# Altium PCB 主控制器.PcbDoc
Units mil, origin at the board's own origin, x right, y up, seen from the top; angles counter-clockwise.
Board outline 2580.03 x 2217.03 mil, 4 copper layers (Top Layer, MidLayer1, MidLayer2, Bottom Layer); 92 components, 94 nets, 348 pads, 139 vias.
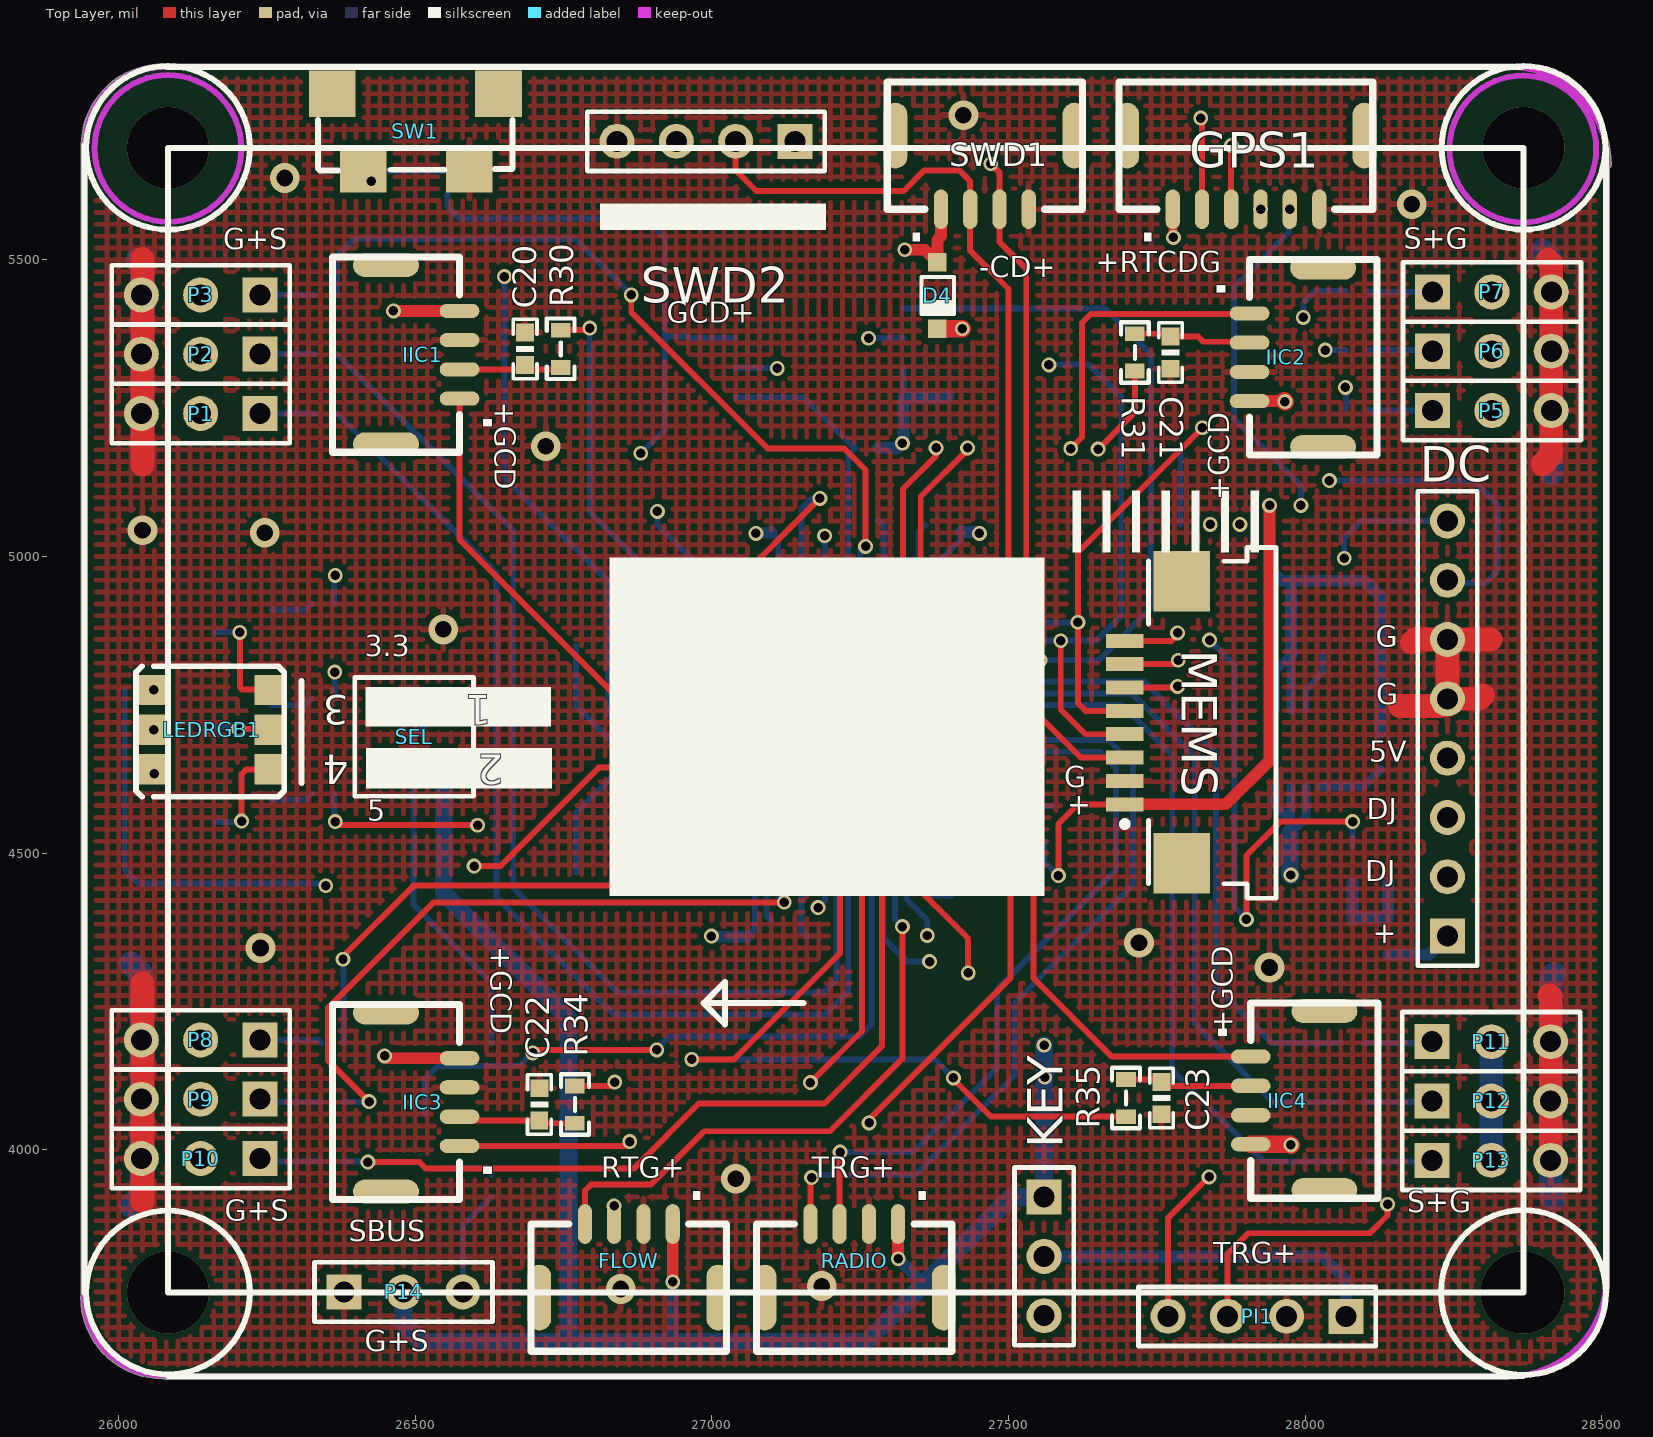
[diagram p0: Top Layer view]
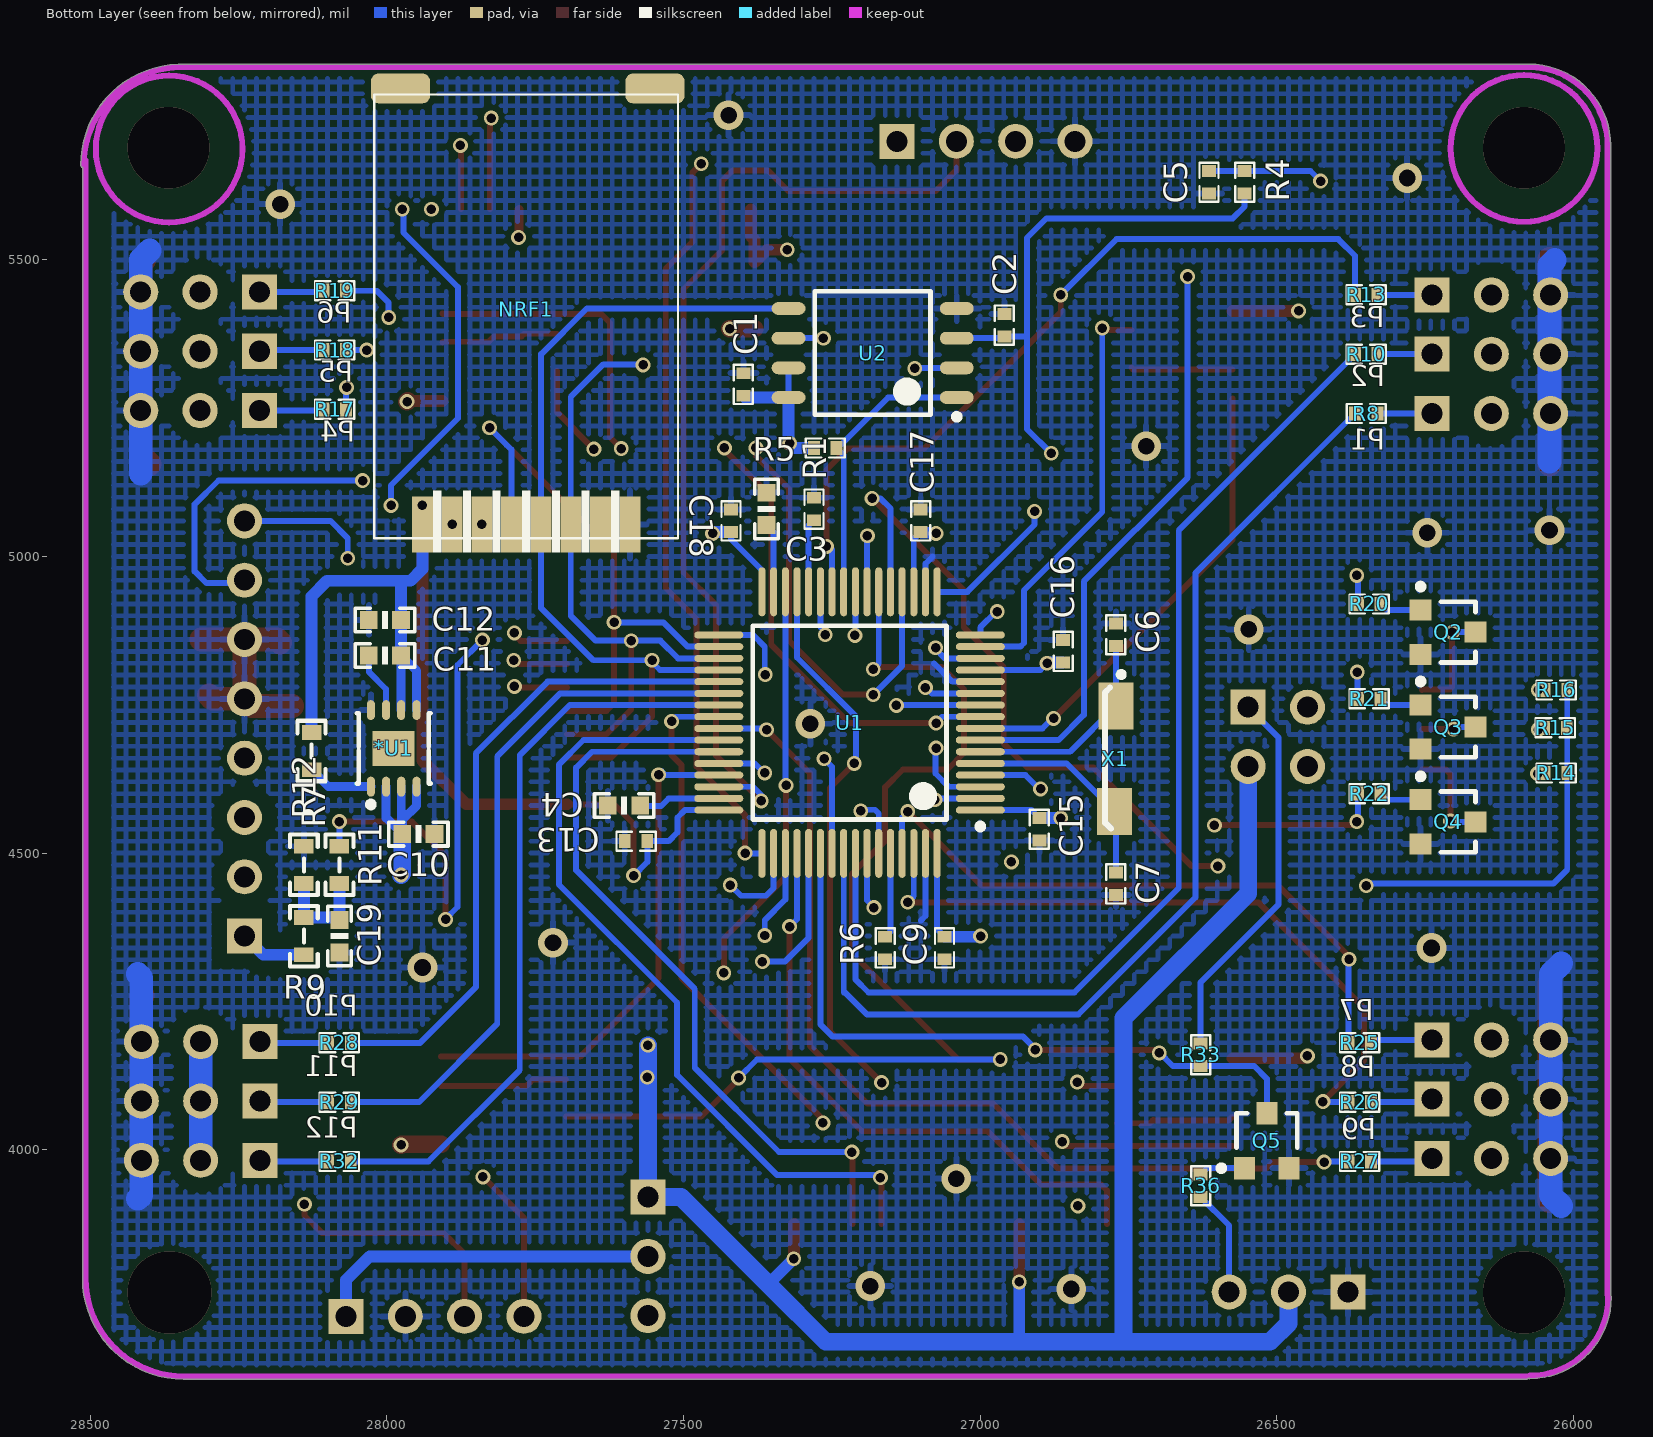
[diagram p1: Bottom Layer view, seen from below]
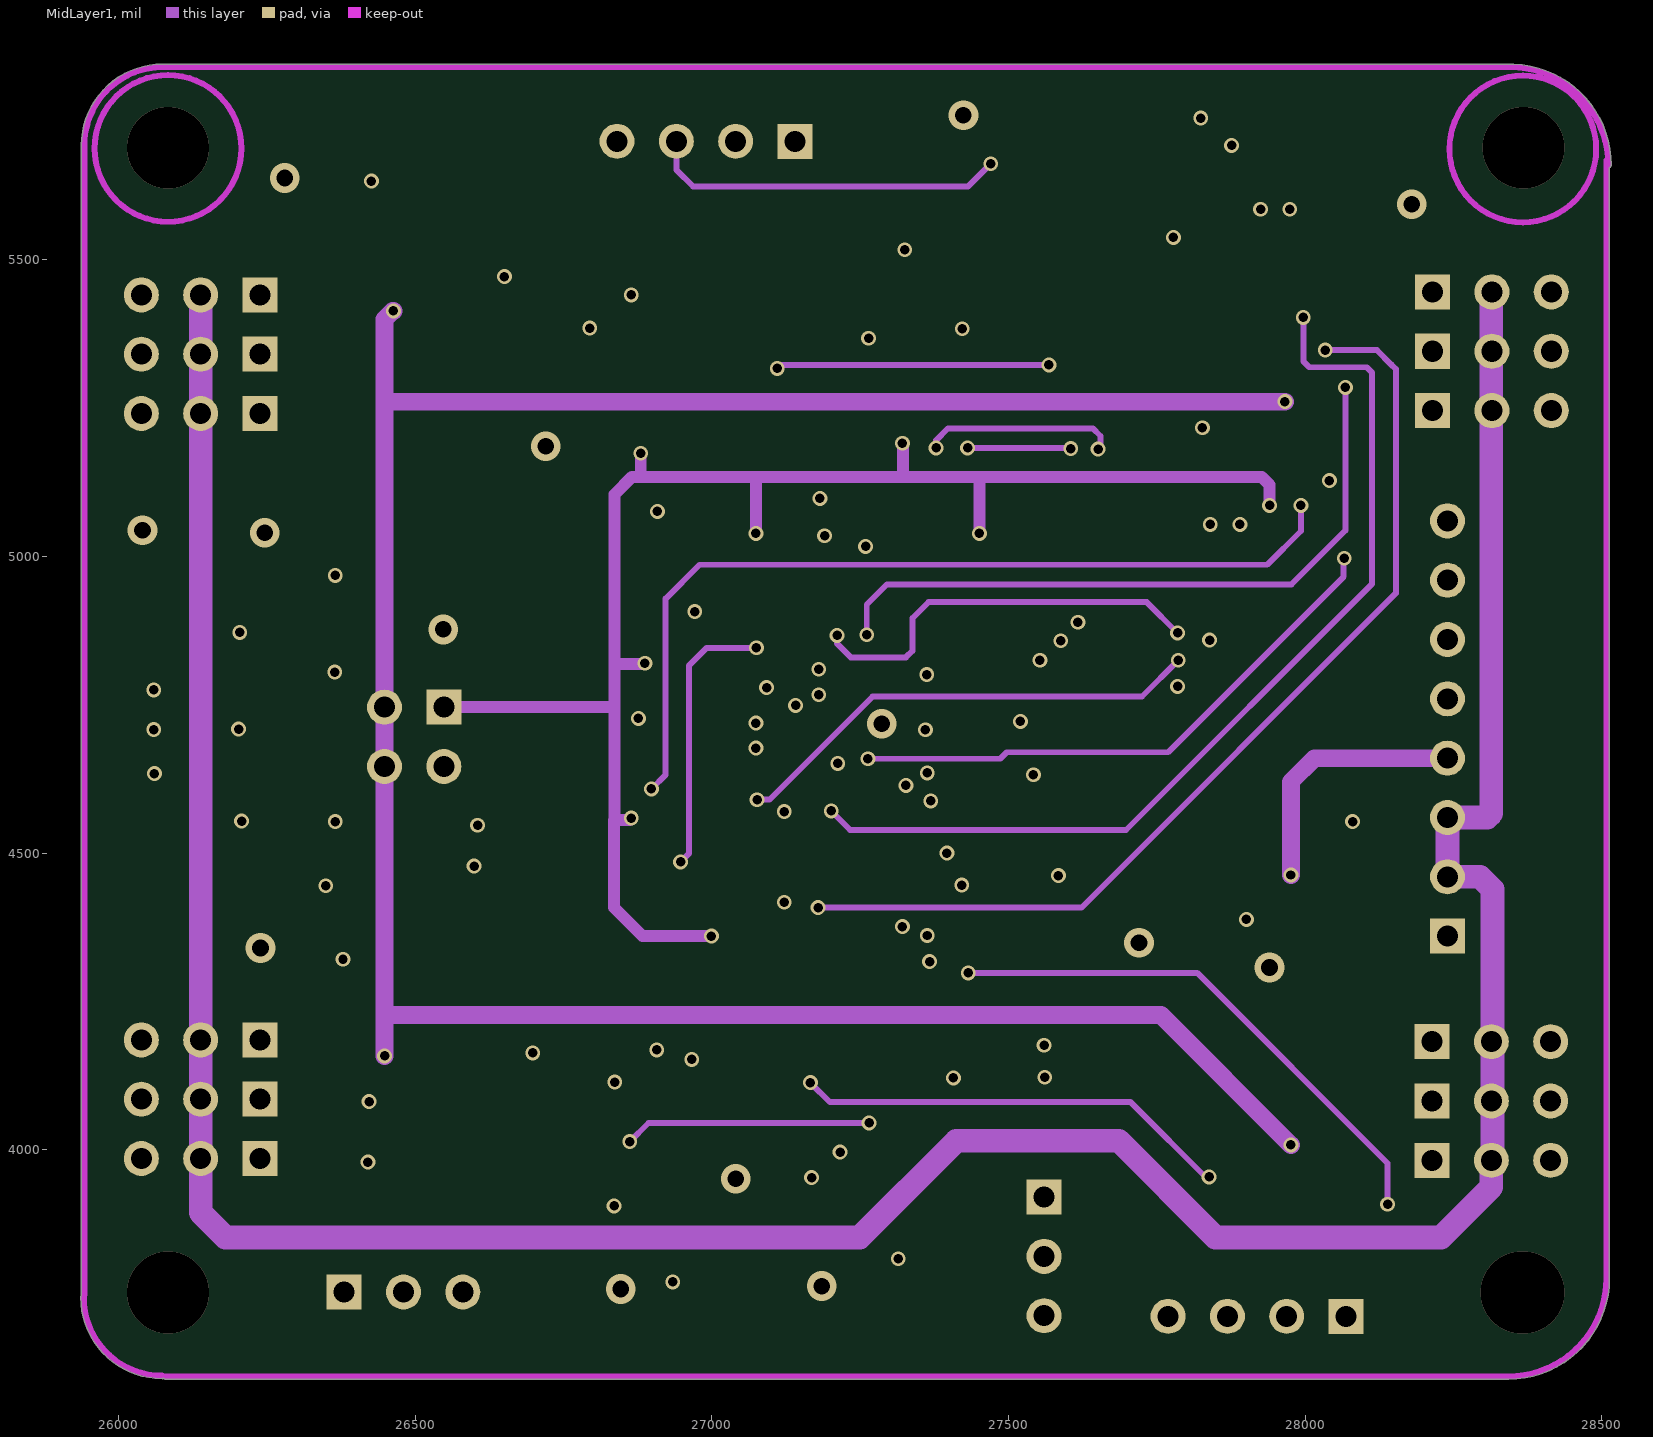
[diagram p2: MidLayer1]
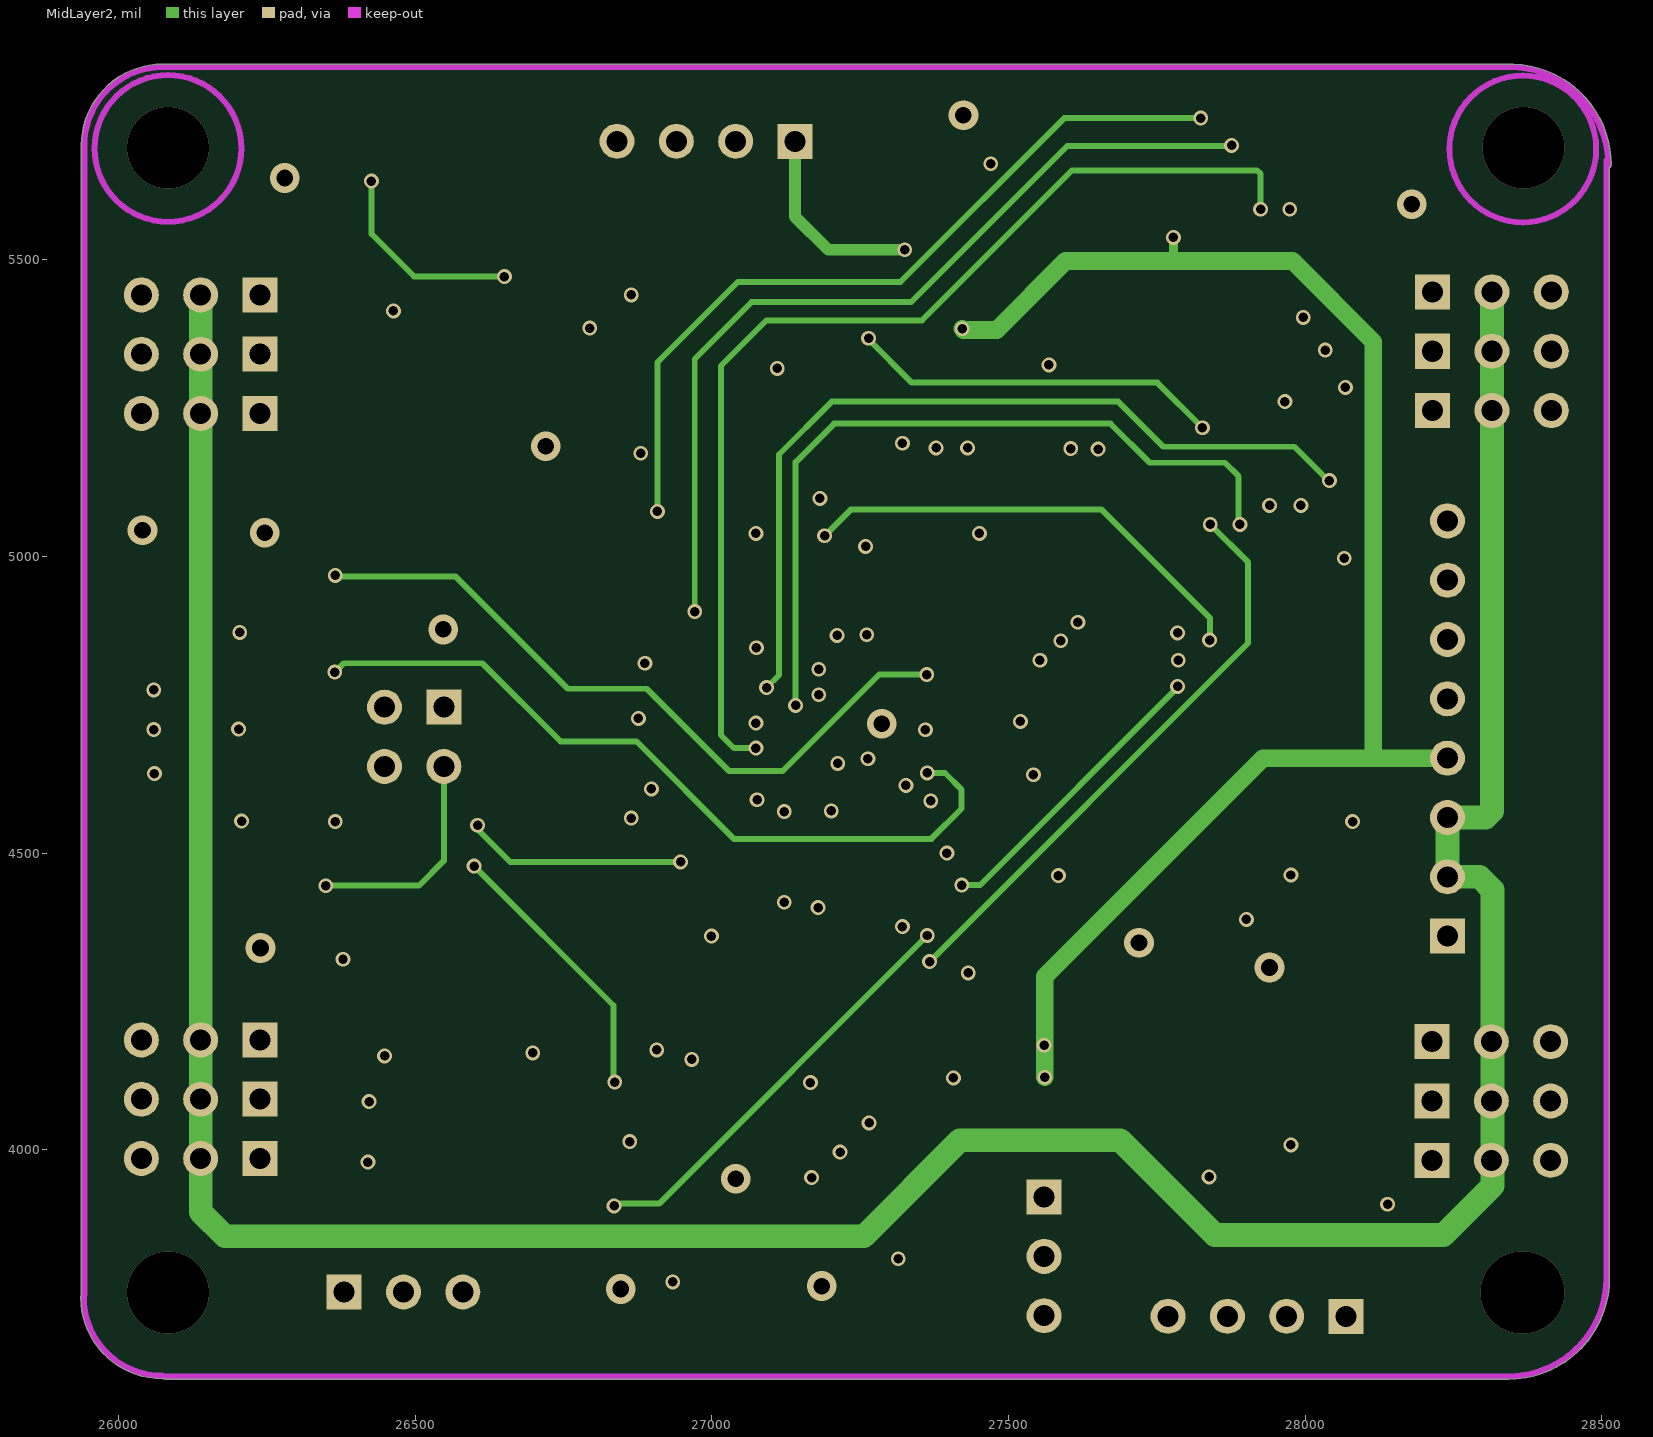
[diagram p3: MidLayer2]
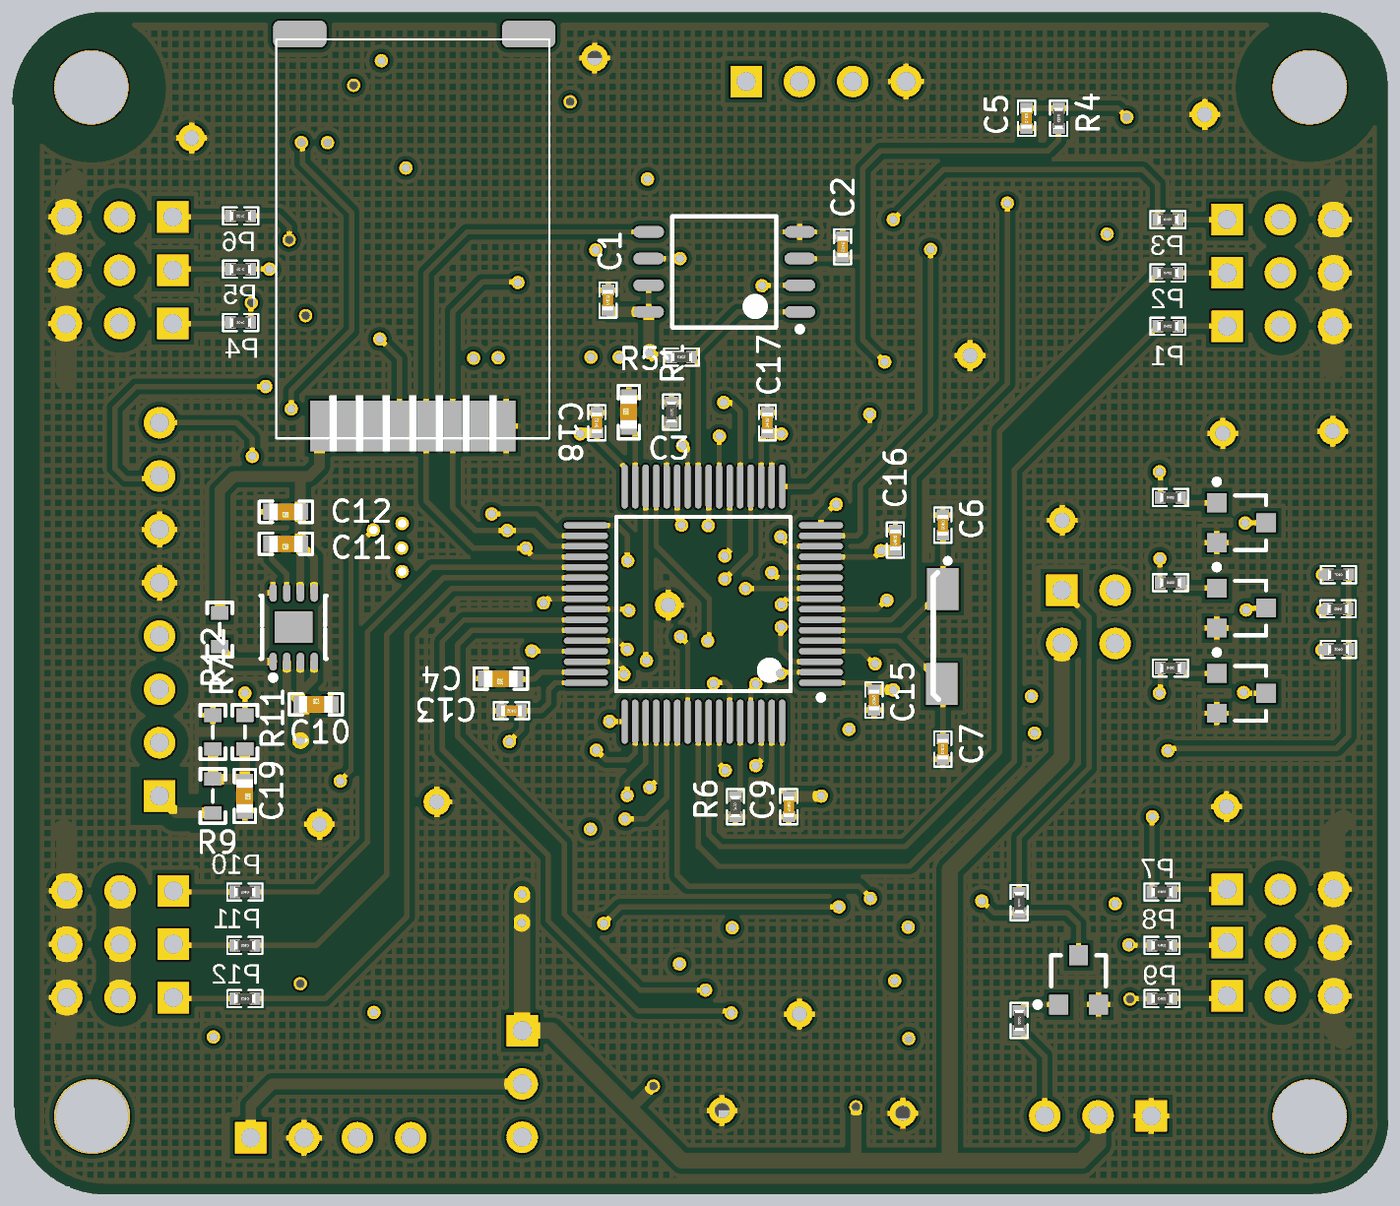
[diagram p4: 3D render of the assembled board from below, using the file's embedded part models]

## Layer stack, top to bottom
Top Layer: signal copper 1.4
Dielectric: core 12.6, FR-4, Dk 4.8
MidLayer1: signal copper 1.4
Dielectric: prepreg 12.6, FR-4, Dk 4.8
MidLayer2: signal copper 1.4
Dielectric: core 12.6, FR-4, Dk 4.8
Bottom Layer: signal copper 1.4

## Board outline
25935.99,3751 cw(c25941,3751) 25937.06,3754.11 cw(c25942,3755) 25936.99,3755 25936.99,5693 cw(c26074,5693) 26074,5830.02 28351,5830.02 cw(c28351,5825) 28352.03,5829.91 cw(c28346,5660) 28516.01,5660 cw(c28511,5660) 28513.01,5655.41 28513.01,3783 cw(c28343,3783) 28343,3612.99 26079,3612.99 cw(c26079,3618) 26075.34,3614.57 cw(c26073,3619) 26073,3613.99 cw(c26073,3751)

## Design rules (kind name [scope] priority, off if disabled: settings)
Clearance Clearance_3 [(InPolygon) vs InNet('VCC_DJ')] p1: gap=25
Clearance Clearance_2 [(InPolygon) vs InNet('POWER')] p2: gap=25
Clearance Clearance_1 [(InPolygon)] p3: gap=10
Clearance [All] p4: gap=6
PolygonConnect [All] p1: connectstyle=Relief reliefconductorwidth=10 reliefentries=4 polygonreliefangle="90 Angle"
RoutingVias [All] p1: holewidth=28 width=50 viastyle="Through Hole" minholewidth=16 minwidth=25 maxholewidth=28 maxwidth=50
SilkscreenOverComponentPads [All] p1: minsilkscreentomaskgap=10
SolderMaskExpansion [All] p1: expansion=4
Width [All] p1: maxlimit=40 minlimit=10 preferedwidth=10 minimp=50.000000 maximp=50.000000 favimp=50.000000
27 further rules are at their usual default settings.

## Components (designator, comment, footprint, x,y, rotation, side; value= is the part's Value field where it differs from the comment)
*U1 "AS1364-BTDT-33" TDFN-8 28027,4612 r270 bottom
C1 "0.1UF" "C 0402" 27399,5290 r90 bottom
C2 "1UF" "C 0402" 26959,5390 r270 bottom
C3 "2.2UF" C0603 27360,5080 r90 bottom
C4 "2.2UF" C0603 27600,4580 r0 bottom
C5 "10NF" "C 0402" 26614,5631 r90 bottom
C6 "20PF" "C 0402" 26771,4868 r270 bottom
C7 "20PF" "C 0402" 26771,4448 r90 bottom
C9 "0.1UF" "C 0402" 27060,4340 r270 bottom
C10 "4.7uf" C0603 27947,4532 r180 bottom
C11 "10nf" C0603 28003,4833 r0 bottom
C12 "4.7uf" C0603 28003,4893 r0 bottom
C13 "0.1UF" "C 0402" 27580,4520 r0 bottom
C15 "0.1UF" "C 0402" 26900,4540 r270 bottom
C16 "0.1UF" "C 0402" 26860,4840 r90 bottom
C17 "0.1UF" "C 0402" 27100,5060 r90 bottom
C18 "0.1UF" "C 0402" 27420,5060 r90 bottom
C19 "100uF" C0603 28080,4360 r270 bottom
C20 "NC" C0603 26685,5350 r90 top
C21 "NC" C0603 27773,5344 r270 top
C22 "NC" C0603 26709,4076 r90 top
C23 "NC" C0603 27758,4087 r270 top
D4 "BAT54WS" SOD-323 27380,5440 r90 top
DC "Header 8" HDR1X8 28240,4360 r90 top
FLOW "Header 4" JST_GH_V4 26860,3660 r180 top
GPS1 "Header 6" JST_GH_V6 27900,5800 r0 top
IIC1 "Header 4" JST_GH_V4 26360,5340 r90 top
IIC2 "Header 4" JST_GH_V4 28121,5336 r270 top
IIC3 "Header 4" JST_GH_V4 26360,4080 r90 top
IIC4 "Header 4" JST_GH_V4 28123,4083 r270 top
KEY "MSK-12D19" HDR1X3 27560,3920 r270 top
LEDRGB1 "5050 RGB" 5050RGB 26089,4775 r0 top
MEMS "Header 8" FH12-8S-1.0SH 27760,4720 r90 top
NRF1 "Header 8" NRF 27940,5080 r90 bottom locked
P1 "Header 3" HDR1X3 26238,5241 r180 top
P2 "Header 3" HDR1X3 26238,5341 r180 top
P3 "Header 3" HDR1X3 26238,5441 r180 top
P5 "Header 3" HDR1X3 28215,5246 r0 top
P6 "Header 3" HDR1X3 28215,5346 r0 top
P7 "Header 3" HDR1X3 28215,5446 r0 top
P8 "Header 3" HDR1X3 26238,4185 r180 top
P9 "Header 3" HDR1X3 26238,4085 r180 top
P10 "Header 3" HDR1X3 26238,3985 r180 top
P11 "Header 3" HDR1X3 28214,4182 r0 top
P12 "Header 3" HDR1X3 28214,4082 r0 top
P13 "Header 3" HDR1X3 28214,3982 r0 top
P14 "Header 3" HDR1X3 26380,3760 r0 top
PI1 "Header 4" HDR1X4 28069,3719 r180 top
Q2 "S8050" SOT-23R 26216,4872.5 r270 bottom
Q3 "S8050" SOT-23R 26216,4712.5 r270 bottom
Q4 "S8050" SOT-23R 26216,4552.5 r270 bottom
Q5 "S8050" SOT-23R 26516.5,4010 r180 bottom
R1 "10K" "R 0402" 27280,5080 r270 bottom
R4 "10K" "R 0402" 26554,5631 r270 bottom
R5 "10K" "R 0402" 27261,5183 r180 bottom
R6 "10K" "R 0402" 27160,4340 r90 bottom
R7 "1K" R0603 28127,4672 r270 bottom
R8 "560R" "R 0402" 26349,5241 r180 bottom
R9 "10K" R0603 28140,4360 r270 bottom
R10 "560R" "R 0402" 26349,5341 r180 bottom
R11 "1K" R0603 28080,4480 r270 bottom
R12 "1K" R0603 28140,4480 r270 bottom
R13 "560R" "R 0402" 26349,5441 r180 bottom
R14 "100R" "R 0402" 26029,4635 r0 bottom
R15 "100R" "R 0402" 26030,4711 r0 bottom
R16 "100R" "R 0402" 26029,4775 r0 bottom
R17 "560R" "R 0402" 28088,5248 r0 bottom
R18 "560R" "R 0402" 28088,5348 r0 bottom
R19 "560R" "R 0402" 28088,5448 r0 bottom
R20 "1K" "R 0402" 26344,4920 r180 bottom
R21 "1K" "R 0402" 26344,4760 r180 bottom
R22 "1K" "R 0402" 26344,4600 r180 bottom
R25 "560R" "R 0402" 26360,4180 r180 bottom
R26 "560R" "R 0402" 26360,4080 r180 bottom
R27 "560R" "R 0402" 26360,3980 r180 bottom
R28 "560R" "R 0402" 28080,4180 r0 bottom
R29 "560R" "R 0402" 28080,4080 r0 bottom
R30 "1K" R0603 26745,5350 r90 top
R31 "1K" R0603 27713,5344 r270 top
R32 "560R" "R 0402" 28080,3980 r0 bottom
R33 "10K" "R 0402" 26628,4160 r90 bottom
R34 "1K" R0603 26769,4076 r90 top
R35 "1K" R0603 27698,4087 r270 top
R36 "560R" "R 0402" 26628,3939 r270 bottom
RADIO "Header 4" JST_GH_V4 27240,3660 r180 top
SEL "Header 2X2" HDR2X2 26548,4746 r180 top
SW1 "SW-PB1" KEY_SAD 26640,5780 r180 top
SWD1 "Header 4" JST_GH_V4 27460,5800 r0 top
SWD2 "Header 4" HDR1X4 27140,5700 r180 top
U1 "STM32F405RGT6" LQFP64_M 27220,4720 r0 bottom locked
U2 "W25X16" W25Q32FVZPIG 27181,5343 r0 bottom
X1 "8MHZ" PXCL 26771,4748 r0 bottom

## Footprints (in the part's own frame and the unit in brackets; to place one, negate y for a bottom-side part, rotate by r counter-clockwise, add the part's x,y. Pads: shape width x height; smd on the part's side, far side on the other; paste and mask are expansions set on the pad)
5050RGB [mm]
  rect 1.3x1.3 smd: 1(-0.762,0) 2(-0.762,-1.7) 3(-0.762,-3.4) 4(4.208,-3.4) 5(4.208,-1.7) 6(4.208,0)
  silkscreen extent -1.52,-4.57 5.56,1.02
C0603 [mil]
  rect 30x30 smd: 1(-27,0) 2(27.5,-0.06)
  silkscreen extent -50,-20 50,20, body extent -31,-16 31,16, height 12
"C 0402" [mil]
  rect 20x23.62 smd: 1(-19,0) 2(19,0)
  silkscreen extent -33,-16 33,16, body extent -20,-10 20,10, height 20
FH12-8S-1.0SH [mm] "Connector; FH12 Series; 8 Position; 1.0mm Spaced Bottom Eccentric Contact"
  rect 2.6x2.4 smd: 0(-6.02,-0.813) 0(6.045,-0.813)
  rect 0.6x1.6 smd: 1(-3.5,1.625) 2(-2.5,1.625) 3(-1.5,1.625) 4(-0.5,1.625) 5(0.5,1.625) 6(1.5,1.625) 7(2.5,1.625) 8(3.5,1.625)
  silkscreen extent -7.52,-4.85 7.49,1.75, body extent -7.49,-4.9 7.51,1.9, height 2.8
HDR1X3 [mm] "Connector; Header; 3 Position"
  rect 1.5x1.5 hole 0.9: 1(0,0)
  round 1.5 hole 0.9: 2(2.54,0) 3(5.08,0)
  silkscreen extent -1.27,-1.27 6.35,1.27
HDR1X4 [mm] "Connector; Header; 4 Position"
  rect 1.5x1.5 hole 0.9: 1(0,0)
  round 1.5 hole 0.9: 2(2.54,0) 3(5.08,0) 4(7.62,0)
  silkscreen extent -1.27,-1.27 8.89,1.27
HDR1X8 [mm] "Connector; Header; 8 Position"
  rect 1.5x1.5 hole 0.9: 1(0,0)
  round 1.5 hole 0.9: 2(2.54,0) 3(5.08,0) 4(7.62,0) 5(10.16,0) 6(12.7,0) 7(15.24,0) 8(17.78,0)
  silkscreen extent -1.27,-1.27 19.05,1.27
HDR2X2 [mm] "Connector; Header; 2x2 Position"
  rect 1.5x1.5 hole 0.9: 1(0,0)
  round 1.5 hole 0.9: 2(0,2.54) 3(2.54,0) 4(2.54,2.54)
  silkscreen extent -1.27,-1.27 3.81,3.81
JST_GH_V4 [mil]
  rrect100% 24x67 smd: 1(-73.82,-214.57) 2(-24.61,-214.57) 3(25,-214.57) 4(74,-214.57)
  rrect100% 40x111 smd: GND(-150.59,-90.55) GND(151,-90.55)
  silkscreen extent -164,-215 165,0, body extent -162,-235 163,-40, height 165
JST_GH_V6 [mil]
  rrect100% 24x67 smd: 1(-123.03,-214.57) 2(-73.82,-214.57) 3(-24.61,-214.57) 4(25,-214.57) 5(74,-214.57) 6(124,-214.57)
  rrect100% 40x111 smd: GND(-199.8,-90.55) GND(200,-90.55)
  silkscreen extent -214,-215 214,0, body extent -212,-232 212,-37, height 165
KEY_SAD [mm]
  rect 2x2 smd: 1(1.245,3.226) 2(5.791,3.226) ""(0,0) ""(7.112,0)
  silkscreen extent -0.61,1.12 7.72,3.28
LQFP64_M [mm] "Thin QFP, 64-Leads, Body 10x10mm, Pitch 0.5mm, IPC Low Density"
  oval 2.1x0.3 smd: 1(-5.6,3.75) 2(-5.6,3.25) 3(-5.6,2.75) 4(-5.6,2.25) 5(-5.6,1.75) 6(-5.6,1.25) 7(-5.6,0.75) 8(-5.6,0.25) 9(-5.6,-0.25) 10(-5.6,-0.75) 11(-5.6,-1.25) 12(-5.6,-1.75) 13(-5.6,-2.25) 14(-5.6,-2.75) 15(-5.6,-3.25) 16(-5.6,-3.75) 33(5.6,-3.75) 34(5.6,-3.25) 35(5.6,-2.75) 36(5.6,-2.25) 37(5.6,-1.75) 38(5.6,-1.25) 39(5.6,-0.75) 40(5.6,-0.25) 41(5.6,0.25) 42(5.6,0.75) 43(5.6,1.25) 44(5.6,1.75) 45(5.6,2.25) 46(5.6,2.75) 47(5.6,3.25) 48(5.6,3.75)
  oval 0.3x2.1 smd: 17(-3.75,-5.6) 18(-3.25,-5.6) 19(-2.75,-5.6) 20(-2.25,-5.6) 21(-1.75,-5.6) 22(-1.25,-5.6) 23(-0.75,-5.6) 24(-0.25,-5.6) 25(0.25,-5.6) 26(0.75,-5.6) 27(1.25,-5.6) 28(1.75,-5.6) 29(2.25,-5.6) 30(2.75,-5.6) 31(3.25,-5.6) 32(3.75,-5.6) 49(3.75,5.6) 50(3.25,5.6) 51(2.75,5.6) 52(2.25,5.6) 53(1.75,5.6) 54(1.25,5.6) 55(0.75,5.6) 56(0.25,5.6) 57(-0.25,5.6) 58(-0.75,5.6) 59(-1.25,5.6) 60(-1.75,5.6) 61(-2.25,5.6) 62(-2.75,5.6) 63(-3.25,5.6) 64(-3.75,5.6)
  silkscreen extent -5.72,-4.15 4.15,4.57, body extent -5,-5 5,5, height 1.6
NRF [mm]
  round 0 all layers, no hole: 0(17.75,-9.44) 0(17.75,0.56)
  rect 2.4x0.9 smd: 1(-0.66,0) 2(-0.66,-1.27) 3(-0.66,-2.54) 4(-0.66,-3.81) 5(-0.66,-5.08) 6(-0.66,-6.35) 7(-0.66,-7.62) 8(-0.66,-8.89)
  silkscreen extent -1.87,-10.94 17.75,2.06
PXCL [mm]
  rect 1.5x2 smd: 1(0,0) 2(0.051,4.521)
  silkscreen extent -0.34,-1.45 0.46,5.26
R0603 [mil] "ÌùÆ"
  rect 25x33 smd: 1(-31.5,0) 2(31.5,0)
  silkscreen extent -51,-24 51,24, body extent -32,-16 32,16, height 20
"R 0402" [mil]
  rect 20x23.62 smd: 1(-19,0) 2(19,0)
  silkscreen extent -33,-16 33,16, body extent -20,-10 20,10, height 12
SOD-323 [mm]
  rect 0.8x0.8 smd: 1(1.422,0) 2(-1.422,0)
  silkscreen extent -0.79,-0.74 0.79,0.69
SOT-23R [mm]
  rect 0.9x0.95 smd: 1(0.95,-1.048) 2(-0.95,-1.048) 3(0,1.302)
  silkscreen extent -2.07,-1.17 1.3,1.3
TDFN-8 [mm] "QFN, 8-Leads, Body 3.0x3.0mm (max), Pitch 0.65mm, IPC Medium Density"
  oval 0.85x0.35 smd: 1(0,0) 2(0,0.65) 3(0,1.3) 4(0,1.956) 5(-3.277,1.956) 6(-3.277,1.295) 7(-3.277,0.65) 8(-3.277,0.001)
  rect 1.5x1.8 smd: 9(-1.636,0.975)
  silkscreen extent -3.14,-0.6 0.89,2.55, body extent -3.14,-0.52 -0.14,2.48, height 0.8
W25Q32FVZPIG [mm] "SOP, 8-Leads, Body 5.3x5.3mm (max), Pitch 1.27mm, IPC Medium Density"
  oval 1.45x0.55 smd: 1(-3.6,1.905) 2(-3.6,0.635) 3(-3.6,-0.635) 4(-3.6,-1.905) 5(3.6,-1.905) 6(3.6,-0.635) 7(3.6,0.635) 8(3.6,1.905)
  silkscreen extent -3.72,-2.65 2.47,2.85, body extent -2.64,-2.64 2.64,2.64, height 2.65

## Part data
*U1: library part AS1364-3.3V
C1 C2 C5 C9 C10 C11 C12 C13 C15 C16 C17 C18 C19 C20 C21 C22 C23: library part CAP, "Capacitor"
C3 C4: library part CAP1, "胆电容"
C6 C7: library part C2, "0805"
D4: library part BAT54, "单肖特基二极管"
DC MEMS NRF1: "Header, 8-Pin"
FLOW IIC1 IIC2 IIC3 IIC4 PI1 RADIO SWD1 SWD2: "Header, 4-Pin"
GPS1: "Header, 6-Pin"
KEY: library part "Header 3", "Header, 3-Pin"
LEDRGB1: library part RGB
P1 P2 P3 P5 P6 P7 P8 P9 P10 P11 P12 P13 P14: "Header, 3-Pin"
Q2 Q3 Q4 Q5: library part NPN, "8050/BCW846/BCW847"
R1 R4 R5 R6 R8 R9 R10 R11 R12 R13 R14 R15 R16 R17 R18 R19 R20 R21 R22 R25 R26 R27 R28 R29 R32 R33 R36: library part Res2, "0603"
R7 R30 R31 R34 R35: library part Res1, "Resistor"
SEL: "Header, 2-Pin, Dual row"
SW1: library part S, "按键"
U2: "W25X16;SST25VF016;MX25L1605"
X1: library part XTAL, "Crystal Oscillator"

## Free pads (board coordinates)
  rrect50% 100x50 smd far side: 0(27548,5789) 0(27977,5789)
  round 78.74 hole 110.24: 0(28368,5689)

## Via types
v1: diameter 25, hole 16, Top Layer to Bottom Layer, 120 vias
v2: diameter 50, hole 28, Top Layer to Bottom Layer, 14 vias
v3: diameter 137.8, hole 137.8, Top Layer to Bottom Layer, 5 vias

## Nets (pads, with @x,y where several pads share a name; then routed paths per layer and width w, separated by ;. In a path a pad name is that pad's centre, name@x,y a point inside that pad or via, vN(x,y) a via of type N, cw(c..) or ccw(c..) an arc to the next point about the centre after c; other vN are vias at no path point)
3.3V: *U1.5 *U1.6 C1.1 C2.2 C9.1 C11.1 C12.1 C13.1 C15.1 C16.1 C17.1 C18.1 MEMS.1 NRF1.1 R4.2 R5.1 R7.1 R33.2 SEL.1 U1.1 U1.13 U1.19 U1.32 U1.48 U1.64 U2.3 U2.7 U2.8 | length 7212.9
  Top Layer w10: v1(27584,4462) 27584,4549 27617.2,4582.2 MEMS.1
  Top Layer w20: MEMS.1 27866.2,4582.2 27940,4656 v1(27940,5086)
  MidLayer1 w20: SEL.1 26834,4746 ; 26836,4557 26836,4819 ; v1@26861,4556 26835,4556 26835,4408 26883,4360 v1@26998,4360 ; 26880,5137 v1(26880,5174) ; v1@26886,4819 26836,4819 ; v1(27074,5039) 27074,5134 ; v1@27322,5190 27322,5134 ; v1(27451,5039) 27451,5133 ; v1(27940,5086) 27940,5121 27927,5134 27322,5134 ; 26836,4819 26836,5105 26865,5134 27074,5134 ; 27074,5134 27322,5134
  Bottom Layer w10: SEL.1 26497,4695 26497,4413 26628,4282 R33.2 ; R4.2 26554,5590 26574,5570 26888,5570 26921,5537 26921,5371 ; v1(26880,5174) 26921,5215 26921,5371 ; v1(26887,4820) 26898.42,4808.58 U1.13 ; C15.1 26913.36,4572.36 U1.1 ; U2.3 26962,5368 C2.2 26921,5371 ; C9.1 27072.36,4371.36 U1.64 ; C17.1 27111.73,5029.27 U1.19 ; U2.8 U2.7 ; U1.32 27367.64,4976.64 27420,5029 C18.1 ; U1.48 27497.64,4572.36 27510,4560 27510,4535 27525,4520 C13.1 27561,4485 v1(27584,4462)
  Bottom Layer w15: *U1.5 27950,4807 C11.1 *U1.6
  Bottom Layer w20: C16.1 v1@26886,4821 ; v1(26864,4559) C15.1 ; v1@27000,4359 C9.1 ; v1@27075,5040 27099,5040 C17.1 ; R5.1 v1@27313,5183 ; v1@27322.73,5192.73 U2.8 27396,5268 C1.1 ; C18.1 v1@27449,5041 ; NRF1.1 27940,4979 27960,4959 27976,4959 ; C11.1 C12.1 27976,4959 ; R7.1 28127,4933 28101,4959 27976,4959
  other v1: 26999,4360 27321,5191
5V: *U1.2 *U1.3 *U1.4 C10.1 D4.2 DC.4 FLOW.1 GPS1.1 KEY.1 P14.2 R14.1 R15.1 R16.1 RADIO.1 SEL.2 | length 7351.5
  Top Layer w15: GPS1.1 27776.97,5539.03 v1(27778,5538)
  Top Layer w20: v1@26933.82,3777 FLOW.1 ; RADIO.1 27313.82,3813.82 27314,3814 v1(27314,3816)
  Top Layer w30: D4.2 v1(27422,5384)
  MidLayer1 w30: v1(27976,4463) 27976,4620 28016,4660 DC.4
  MidLayer2 w10: v1(26349,4445) 26506,4445 26548,4487 SEL.2
  MidLayer2 w15: 27778,5498 v1(27778,5538)
  MidLayer2 w30: v1(27422,5384) 27424,5382 27480,5382 27596,5498 27778,5498 27979,5498 28115,5362 28115,4660 ; v1(27561,4122) 27561,4292 27929,4660 28115,4660 ; DC.4 28115,4660
  Bottom Layer w10: R16.1 R14.1 26010,4472 26033,4449 26344,4449 26349,4444 v1(26349,4445)
  Bottom Layer w15: *U1.4 27950,4580 27974,4556 C10.1 C10.1@27975.82,4533.82 ; *U1.3 C10.1@27975.82,4533.82 ; *U1.2 28001.41,4559.41 C10.1@27975.82,4533.82
  Bottom Layer w20: 26931,3676 26934,3679 v1(26934,3777) ; v1(27314,3816) 27352.5,3777.5 27352.5,3768.5
  Bottom Layer w30: P14.2 26480,3707 26511,3676 26758,3676 ; SEL.2 26548,4432 26758,4222 26758,3676 ; v1@27560,4122 27560,4085 ; v1(27560,4176) 27560,4085 ; C10.1 27974,4465 v1(27976,4463) ; 26758,3676 26931,3676 27260,3676 27352.5,3768.5 27504,3920 KEY.1 27560,4085
BAT: R11.1 U1.23 | length 1736.9
  Top Layer w10: v1(27901,4388) 27901,4496 27958,4553 v1(28080,4553)
  MidLayer2 w10: v1(27190,5035) 27234,5079 27657,5079 27783,4953 ; 27790,4946 27783,4953 ; v1(27839,4859) 27840,4858 27840,4896 27783,4953
  Bottom Layer w10: v1(27190,5035) 27190.47,5034.53 U1.23 ; v1(27839,4859) 27881,4817 27881,4409 27901,4389 v1(27901,4388) ; R11.1 v1(28080,4553)
BEEP: DC.8 U1.55 | length 1345.6
  MidLayer1 w10: v1(27263,4659) 27486,4659 27497,4670 27769,4670 28065,4966 28065,4996 v1(28066,4997)
  Bottom Layer w10: U1.55 27249.53,4645.53 v1(27263,4659) ; v1(28066,4997) 28066,5031 28095,5060 DC.8
CS1: MEMS.8 U1.24 | length 842.8
  Top Layer w10: MEMS.8 27774.79,4857.79 v1@27785,4868
  MidLayer1 w10: 27211,4853 27234,4830 27327,4830 27338,4841 27338,4896 27365,4923 27733,4923 v1(27785,4871)
  Bottom Layer w10: U1.24 27210.16,4867.84 v1(27211,4867)
CS2: R5.2 U1.25 U2.1 | length 485.5
  Bottom Layer w10: U2.1 27155,5268 27240,5183 R5.2 27229.84,5170.84 U1.25
CS3: NRF1.3 U1.53 | length 1223.1
  MidLayer2 w10: v1(27367,4317) 27904,4854 27904,4990 v1(27840,5054)
  Bottom Layer w10: U1.53 27288.9,4357.1 27329,4317 v1(27367,4317)
CS4: MEMS.7 U1.2 | length 975.5
  Top Layer w10: MEMS.7 27779.42,4818.42 v1(27786,4825)
  MidLayer1 w10: v1(27076,4590) 27097,4590 27271,4764 27725,4764 v1(27786,4825)
  Bottom Layer w10: U1.2 v1@27074.95,4592.05
CS5: MEMS.6 U1.50 | length 738.7
  Top Layer w10: MEMS.6 27783.05,4779.05 v1(27785,4781)
  MidLayer2 w10: v1(27421,4446) 27452,4446 27782,4776 27782,4779 27784,4781 v1(27785,4781)
  Bottom Layer w10: U1.50 27347.95,4441.05 27361,4428 27403,4428 v1(27421,4446)
EN: DC.7 U1.11 | length 2026.5
  MidLayer2 w10: v1(27092,4779) 27113,4800 27113,5172 27202,5261 27685,5261 27738,5208 27761,5185 27982,5185 28039,5128 v1(28041,5128)
  Bottom Layer w10: U1.11 27081.21,4769.21 27092,4780 v1(27092,4779) ; v1(28041,5128) 28284,5128 28324,5088 28324,4975 28304,4955 28245,4955 DC.7
GND: *U1.8 C1.2 C2.1 C3.2 C4.2 C5.1 C6.1 C7.1 C9.2 C10.2 C12.2 C13.2 C15.2 C16.2 C17.2 C18.2 C19.2 C20.2 C21.2 C22.2 C23.2 DC.5 DC.6 FLOW.2 GPS1.6 IIC1.3 IIC2.3 IIC3.3 IIC4.3 MEMS.2 NRF1.8 P1.3 P2.3 P3.3 P5.3 P6.3 P7.3 P8.3 P9.3 P10.3 P11.3 P12.3 P13.3 P14.1 PI1.2 Q2.1 Q3.1 Q4.1 Q5.1 R1.1 R6.1 R12.1 RADIO.2 SW1.1 SWD1.4 SWD2.4 U1.12 U1.18 U1.63 U2.4 | length 3633.9
  Top Layer w40: 26040,3913 26040,4280 ; 26040,5155 26040,5502 ; 28160,4748 28228,4748 DC.5 ; 28180,4855 28185,4860 DC.6 ; 28300,4766 28294,4760 DC.5 ; 28313,4860 DC.6 ; 28400,5156 28415,5171 P5.3 P6.3 ; 28409,5500 28415,5494 P7.3 ; 28412,4260 28414,4258 P11.3 P12.3 P13.3 ; DC.5 DC.6 ; P6.3 P7.3 ; P6.3 P7.3
  Bottom Layer w10: U1.12 27046.77,4788.9 27077.49,4819.62 ; 27080,5000 27092.05,4987.95 U1.18 ; U1.63 27092.05,4393.95 27100,4386
  Bottom Layer w40: 26020,3905 26038,3923 P10.3 P9.3 P8.3 26038,4296 26020,4314 ; 26031,5500 26040,5491 26040,5341 26040,5160 ; 28400,5516 28415,5501 P7.3 P6.3 P5.3 28415,5140 ; 28420,3917 28414,3923 P13.3 P12.3 P11.3 28414,4290 28420,4296
  other v2: 26846,3765 27185,3770 27040,3951 27940,4307 26239,4340 27720,4349 27286,4718 26547,4877 26246,5040 26040,5044 26720,5186 28180,5594 26280,5638 27424,5744
GROUND1: R30.2 U1.15 | length 713
  Top Layer w10: R30.2 26790.5,5381.5 v1(26794,5385)
  Bottom Layer w10: v1(26794,5385) 26793,5384 26793,5382 26794,5381 26794,5075 26926,4943 26926,4854 26932.05,4847.95 U1.15
GROUND2: R31.2 U1.20 | length 1211.2
  Top Layer w10: v1(27180,4767) 27231,4767 27322,4858 27322,5114 27378,5170 v1(27378,5183) ; v1(27651,5181) 27713,5243 R31.2
  MidLayer1 w10: v1(27378,5183) 27378,5196 27398,5216 27642,5216 27655,5203 27655,5179 27653,5179 v1(27651,5181)
  Bottom Layer w10: U1.20 27131.42,4815.58 v1(27180,4767)
GROUND3: R34.2 U1.21 | length 1659.8
  Top Layer w10: v1(26599,4478) 26643,4478 26809,4644 26920,4644 26960,4684 26960,4813 27027.5,4880.5 27027.5,4943.5 v1(27182,5098) ; R34.2 26829.5,4107.5 v1(26836,4114)
  MidLayer2 w10: v1(26599,4478) 26834,4243 v1@26834,4116
  Bottom Layer w10: U1.21 27151.1,5081.1 27168,5098 v1(27182,5098)
GROUND4: R35.2 U1.22 | length 1967
  Top Layer w10: v1(26966,4152) 27037,4152 27216,4331 27216,4465 27160,4521 27160,4611 27130,4641 27055,4641 27027,4669 27027,4776 27065,4814 v1@27180,4814 ; v1@27406,4120 27470.5,4055.5 R35.2
  Bottom Layer w10: v1(26966,4152) 27376,4152 v1(27407,4121) ; U1.22 27170.79,4819.21 v1(27180,4810)
GROUND11: IIC1.1 U1.8 | length 808.7
  Top Layer w10: IIC1.1 26574.57,5028.43 v1(26876,4727)
  Bottom Layer w10: v1(26876,4727) 26871,4732 26873,4732 26894.84,4710.16 U1.8
GROUND22: IIC2.1 U1.9 | length 1464.5
  Top Layer w10: v1(27074,4719) 27220,4719 27352,4851 27352,5101 27431,5180 v1(27431,5183) ; v1(27605,5182) 27624,5201 27624,5394 27639,5409 27905.61,5409 IIC2.1
  MidLayer1 w10: v1(27431,5183) 27604,5183 v1(27605,5182)
  Bottom Layer w10: U1.9 27064.16,4729.84 27076,4718 27075,4718 v1(27074,4719)
GROUND33: IIC3.1 U1.40 | length 1578.6
  Top Layer w10: IIC3.1 26857.18,4006.18 26862,4011 26861.48,4011.52 v1(26861.48,4013.48) ; v1(27265,4045) 27262,4048 27503,4289 27503,4648 27520,4665 v1(27520,4722)
  MidLayer1 w10: v1(26861.48,4013.48) 26893,4045 v1(27265,4045)
  Bottom Layer w10: U1.40 27513.16,4729.84 27521,4722 v1(27520,4722)
GROUND44: IIC4.1 U1.45 | length 871.5
  Top Layer w10: v1(27542,4632) 27542,4289 27674.18,4156.82 IIC4.1
  Bottom Layer w10: U1.45 27530.42,4631.42 27537,4638 27542,4633 v1(27542,4632)
LED_11: R22.1 U1.14 | length 1211
  Top Layer w10: v1(26365,4553) 26366,4553 26372,4547 v1(26605,4547)
  MidLayer1 w10: v1(26947,4485) 26961,4499 26961,4816 26991,4846 v1(27075,4846)
  MidLayer2 w10: v1(26605,4547) 26605,4544 26603,4542 26660,4485 v1(26947,4485)
  Bottom Layer w10: R22.1 26363,4555 v1(26365,4553) ; U1.14 27059.27,4828.27 27075,4844 v1(27075,4846)
LED_12: R21.1 U1.44 | length 1439.5
  MidLayer2 w10: v1(26364,4805) 26379,4820 26613,4820 26745,4688 26873,4688 27037,4524 27370,4524 27421,4575 27421,4607 27393,4635 v1(27363,4635)
  Bottom Layer w10: R21.1 26364,4761 v1(26364,4805) ; v1(27363,4635) 27363,4634 27380.1,4651.1 U1.44
LED_13: R20.1 U1.33 | length 1383.6
  MidLayer2 w10: v1(26365,4968) 26365,4967 26366,4966 26568,4966 26757,4777 26890,4777 27029,4638 27119,4638 27282,4801 v1(27362,4801)
  Bottom Layer w10: R20.1 26363,4966 v1(26365,4968) ; v1(27362,4801) 27363,4802 27363,4848 27382.64,4867.64 U1.33
Net*U1_1: *U1.1 R7.2 | length 111.8
  Bottom Layer w15: *U1.1 28098.5,4612 R7.2
Net*U1_7: *U1.7 C11.2 | length 104.1
  Bottom Layer w10: *U1.7 28001.41,4776.41 28030.5,4805.5 C11.2
NetC3_1: C3.1 U1.31 | length 117.5
  Bottom Layer w10: U1.31 27347.95,5040.95 C3.1
NetC4_1: C4.1 U1.47 | length 138.3
  Bottom Layer w10: U1.47 27524.95,4592.05 27538,4579 27572,4579 C4.1
NetC5_2: C5.2 R4.1 SW1.2 U1.7 | length 1541.5
  MidLayer2 w10: v1(26426,5633) 26426,5544 26498,5472 v1(26650,5472)
  Bottom Layer w10: v1(26426,5633) 26443,5650 R4.1 C5.2 ; v1(26650,5472) 26650,5133 26825,4958 26825,4733 26867.53,4690.47 U1.7
NetC6_2: C6.2 U1.6 X1.1 | length 361.5
  Bottom Layer w10: C6.2 X1.1 26848.21,4670.79 U1.6
NetC7_2: C7.2 U1.5 X1.2 | length 363.9
  Bottom Layer w10: C7.2 26771,4568 X1.2 26854.1,4651.1 U1.5
NetC19_1: C19.1 R9.1 R11.2 R12.2 | length 180.4
  Bottom Layer w20: R11.2 C19.1 28084.5,4391.5 R9.1 R12.2
NetC20_1: C20.1 IIC1.2 R30.1 | length 171.7
  Top Layer w10: IIC1.2 26741.89,5315.39 R30.1
NetC21_1: C21.1 IIC2.2 R31.1 | length 199.6
  Top Layer w10: R31.1 27768.5,5375.5 C21.1 27819,5371 27828,5362 27905.04,5362 IIC2.2
NetC22_1: C22.1 IIC3.2 R34.1 | length 200.4
  Top Layer w10: IIC3.2 26580.96,4049 C22.1 ; C22.1@26708,4050 C22.1 ; R34.1 26713.5,4044.5 C22.1
NetC23_1: C23.1 IIC4.2 R35.1 | length 214.9
  Top Layer w10: R35.1 27753.5,4118.5 C23.1 27764.39,4107.61 IIC4.2
NetD4_1: D4.1 SWD1.1 SWD2.1 | length 502.2
  Top Layer w20: v1(27325,5517) 27359,5517 D4.1 27380,5534 27386.18,5540.18 SWD1.1
  MidLayer2 w20: SWD2.1@27148,5692 SWD2.1 27140,5573 27196,5517 v1(27325,5517)
NetKEY_2: KEY.2 PI1.1 | length 586.6
  Bottom Layer w20: KEY.2 27875,3820 28029,3820 28069,3780 PI1.1
NetLEDRGB1_1: LEDRGB1.1 R16.2 | length 11
  Bottom Layer w10: R16.2 v1(26059,4775)
NetLEDRGB1_2: LEDRGB1.2 R15.2 | length 11.2
  Bottom Layer w10: R15.2 26056.07,4711 v1(26059,4708.07)
NetLEDRGB1_3: LEDRGB1.3 R14.2 | length 10
  Top Layer w10: LEDRGB1.3@26052,4634 26052,4634.14 LEDRGB1.3
  other v1: 26060,4634
NetLEDRGB1_4: LEDRGB1.4 Q4.3 | length 172.9
  Top Layer w10: v1(26207,4554) 26207,4633 26215.14,4641.14 LEDRGB1.4
  Bottom Layer w10: Q4.3 26205.5,4552.5 v1(26207,4554)
NetLEDRGB1_5: LEDRGB1.5 Q3.3 | length 91.8
  Top Layer w10: v1(26202,4709) 26253.74,4709 LEDRGB1.5
  Bottom Layer w10: Q3.3 26198.5,4712.5 v1(26202,4709)
NetLEDRGB1_6: LEDRGB1.6 Q2.3 | length 184.2
  Top Layer w10: v1(26204,4872) 26204,4780 26208,4776 26253.67,4776 LEDRGB1.6
  Bottom Layer w10: Q2.3 26203.5,4872.5 v1(26204,4872)
NetP1_1: P1.1 R8.2 | length 92
  Bottom Layer w10: P1.1 R8.2
NetP2_1: P2.1 R10.2 | length 92
  Bottom Layer w10: P2.1 R10.2
NetP3_1: P3.1 R13.2 | length 92
  Bottom Layer w10: P3.1 R13.2
NetP5_1: P5.1 R17.2 | length 108.8
  Bottom Layer w10: R17.2 28109,5246 P5.1
NetP6_1: P6.1 R18.2 | length 108.8
  Bottom Layer w10: R18.2 28213,5348 P6.1
NetP7_1: P7.1 R19.2 | length 108.8
  Bottom Layer w10: R19.2 28109,5446 P7.1
NetP8_1: P8.1 R25.2 | length 105.1
  Bottom Layer w10: P8.1 26336,4185 R25.2
NetP9_1: P9.1 R26.2 | length 105.1
  Bottom Layer w10: P9.1 26243,4080 R26.2
NetP10_1: P10.1 R27.2 | length 105.1
  Bottom Layer w10: P10.1 26243,3980 R27.2
NetP11_1: P11.1 R28.2 | length 115.8
  Bottom Layer w10: R28.2 28212,4180 P11.1
NetP12_1: P12.1 R29.2 | length 115.8
  Bottom Layer w10: R29.2 28212,4080 P12.1
NetP13_1: P13.1 R32.2 | length 115.8
  Bottom Layer w10: R32.2 28212,3980 P13.1
NetP14_3: P14.3 R36.2 | length 179.9
  Bottom Layer w10: P14.3 26580,3872 R36.2
NetQ2_2: Q2.2 R20.2 | length 71.9
  Bottom Layer w10: Q2.2 26314.91,4909.91 R20.2
NetQ3_2: Q3.2 R21.2 | length 71.9
  Bottom Layer w10: Q3.2 26314.91,4749.91 R21.2
NetQ4_2: Q4.2 R22.2 | length 71.9
  Bottom Layer w10: Q4.2 26314.91,4589.91 R22.2
NetQ5_2: Q5.2 R36.1 | length 78.6
  Bottom Layer w10: Q5.2 26617.26,3968.74 R36.1
NetR1_2: R1.2 U1.28 | length 124.2
  Bottom Layer w10: R1.2 27288.9,5052.1 U1.28
NetR6_2: R6.2 U1.60 | length 144.2
  Bottom Layer w10: U1.60 27151.1,4367.9 R6.2
NRF_CE: NRF1.2 U1.10 | length 1444.3
  MidLayer2 w10: v1(27141,4749) 27141,5159 27206,5224 27672,5224 27738,5158 27865,5158 27888,5135 27888,5056 v1(27890,5054)
  Bottom Layer w10: U1.10 27140.47,4749.53 v1(27141,4749)
NRF_IRQ: NRF1.7
POWER: DC.1 R9.2 | length 113
  Bottom Layer w20: R9.2 28208.5,4328.5 DC.1
PWM1: R8.1 U1.56 | length 1852.5
  Bottom Layer w10: R8.1 26637,4972 26637,4425 26834,4228 27190.84,4228 27229.84,4267 ; 27229.84,4265 27229.84,4267 ; U1.56 27229.84,4267
PWM2: R10.1 U1.57 | length 1862.7
  Bottom Layer w10: R10.1 26665,5044 26665,4441 26841,4265 27188.16,4265 27210.16,4287 U1.57
PWM3: R13.1 U1.26 | length 1358.5
  Top Layer w10: v1(26864,5441) 26864,5412 27094,5182 27223,5182 27259,5146 v1(27259,5017)
  Bottom Layer w10: R13.1 26368,5507 26396,5535 26770,5535 v1(26864,5441) ; U1.26 27249.53,5011.53 27255,5017 v1(27259,5017)
PWM4: R17.1 U1.27 | length 1267.1
  MidLayer1 w10: v1(27261,4868) 27261,4919 27295,4953 27977,4953 28068,5044 v1(28068,5285)
  Bottom Layer w10: v1(27261,4868) 27259,4870 27258,4870 27269.21,4881.21 U1.27 ; v1(28068,5285) 28069,5284 R17.1
PWM5: R18.1 U1.58 | length 1835.1
  MidLayer1 w10: v1(27179,4408) 27623,4408 28153,4938 28153,5316 28145.5,5323.5 28121,5348 v1(28034,5348)
  Bottom Layer w10: v1(27179,4408) 27179,4409 27190.47,4420.47 U1.58 ; v1(28034,5348) R18.1
PWM6: R19.1 U1.59 | length 1858.4
  MidLayer1 w10: v1(27201,4571) 27233,4539 27698,4539 28113,4954 28113,5310 28104,5319 28007,5319 27997,5329 v1(27997,5403)
  Bottom Layer w10: U1.59 27170.79,4566.79 27177,4573 27201,4573 v1(27201,4571) ; v1(27997,5403) 27997,5428 28017,5448 R19.1
PWM7: R25.1 U1.61 | length 1072.9
  Top Layer w10: v1(26378,4321) 26376,4319 26376,4324 26497,4445 26997,4445 v1(27122,4570)
  Bottom Layer w10: v1(26378,4321) 26379,4320 R25.1 ; v1(27122,4570) 27121,4570 27131.42,4559.58 U1.61
PWM8: R26.1 U1.62 | length 1158.1
  Top Layer w10: v1(26422,4081) 26353,4150 26353,4239 26531,4417 v1(27122,4417)
  Bottom Layer w10: R26.1 v1@26421,4080 ; U1.62 27111.73,4427.27 v1(27122,4417)
PWM9: R27.1 U1.41 | length 1643.3
  Top Layer w10: v1(26420,3979) 26507,3979 26518,3968 26868,3968 26977.9,4077.9 27189.9,4077.9 27287,4175 27287,4635 v1(27360,4708)
  Bottom Layer w10: R27.1 26419,3980 v1(26420,3979) ; v1(27360,4708) 27362.16,4710.16 U1.41
PWM10: R28.1 U1.37 | length 1103.5
  Bottom Layer w10: U1.37 27729.1,4788.9 27850,4668 27850,4274 27944,4180 R28.1
PWM11: R29.1 U1.38 | length 1170.2
  Bottom Layer w10: U1.38 27707.79,4769.21 27814,4663 27814,4212 27946,4080 R29.1
PWM12: R32.1 U1.39 | length 1250.3
  Bottom Layer w10: U1.39 27691.47,4749.53 27776,4665 27776,4134 27930,3980 R32.1
SBUS: Q5.3 R33.1 U1.54 | length 1142.7
  Top Layer w10: v1(26698,4163) 26703,4168 v1(26907,4168)
  Bottom Layer w10: Q5.3 26516.5,4119.5 26538,4141 R33.1 26675,4141 26699,4165 26699,4164 v1(26698,4163) ; v1(26907,4168) 26907,4170 26928,4191 27249,4191 27269.21,4211.21 U1.54
SCL_B: GPS1.4 U1.3 | length 1927
  MidLayer2 w10: v1(27074,4677) 27037,4677 27015,4699 27015,5321 27092,5398 27354,5398 27607,5651 27919,5651 27925,5645 v1(27925,5585.43)
  Bottom Layer w10: U1.3 27052.73,4611.73 27075,4634 27075,4676 v1(27074,4677)
SCLK_FC: SWD1.3 SWD2.3 U1.49 | length 1893.3
  Top Layer w10: v1(27396,4500) 27396,4564 27478,4646 27478,4895 27529.88,4946.88 27529.88,5367 ; v1(27470,5662) 27485,5647 SWD1.3 27485,5530 27529.88,5485.12 27529.88,5367 ; 27529.88,5384.12 27529.88,5367
  MidLayer1 w10: SWD2.3 26940,5652 26968,5624 27432,5624 v1(27470,5662)
  Bottom Layer w10: U1.49 27395.53,4499.53 v1(27396,4500)
SDA_B: GPS1.5 U1.4 | length 2186.3
  MidLayer1 w10: v1(26898,4608) 26922,4632 26922,4929 26979,4986 27936,4986 27993,5043 v1(27993,5086)
  Bottom Layer w10: v1(26898,4608) 26900,4608 26923.42,4631.42 U1.4 ; v1@27972,5584 27972,5546 27880,5454 27880,5233 27993,5120 v1(27993,5086)
  other v1: 27974,5585.43
SPI3_CK: MEMS.5 NRF1.4 U1.34 U2.6 | length 1734
  Top Layer w10: MEMS.5 27630,4739.68 27617,4752.68 v1(27617,4889) 27617,5007 v1(27827,5217)
  MidLayer2 w10: v1(27264,5368) 27264,5366 27337,5293 27751,5293 v1(27827,5217)
  Bottom Layer w10: v1(27264,5368) U2.6 ; U1.34 27492.95,4847.95 27534,4889 v1(27617,4889) ; NRF1.4 27790,5180 v1(27827,5217) 27798,5188
SPI3_SI: MEMS.3 NRF1.5 U1.36 U2.5 | length 1488.3
  Top Layer w10: v1(27553,4825) 27553,4730 27622.06,4660.94 MEMS.3
  Bottom Layer w10: U2.5 27663,5418 27740,5341 NRF1.5 27740,4913 27652,4825 v1(27553,4825) 27553,4822 27539.58,4808.58 U1.36
SPI3_SO: MEMS.4 NRF1.6 U1.35 U2.2 | length 1573.2
  Top Layer w10: v1(27588,4858) 27588,4742 27629.69,4700.31 MEMS.4
  MidLayer1 w10: v1(27110,5317) 27109,5317 27115,5323 v1(27568,5323)
  Bottom Layer w10: U2.2 27109,5318 v1(27110,5317) ; U1.35 27509.27,4828.27 27539,4858 v1(27588,4858) 27648,4858 27690,4900 NRF1.6 27690,5269 27635,5324 27571,5324 27568,5327 v1(27568,5323)
SWD_FC: SWD1.2 SWD2.2 U1.46 | length 1695.2
  Top Layer w10: SWD2.2 27040,5651 27075,5616 27323,5616 27358,5651 27417,5651 27435.39,5632.61 SWD1.2 27435.39,5515.61 27500,5451 27500,4973 27445,4918 27445,4664 v1(27369,4588)
  Bottom Layer w10: v1(27369,4588) 27368,4588 27368,4597 27382.73,4611.73 U1.46
UART1_R_1: RADIO.3 U1.43 | length 1286.1
  Top Layer w10: RADIO.3 27215,3995 v1(27216,3996)
  Bottom Layer w10: v1(27216,3996) 27339,3996 27481,4138 27481,4271 27681,4471 27681,4644 27654.21,4670.79 U1.43
UART1_T_1: RADIO.4 U1.42 | length 1392.6
  Top Layer w10: RADIO.4 27166,3951 v1(27168,3953)
  Bottom Layer w10: v1(27168,3953) 27168,3954 27165,3957 27236,3957 27342,3957 27511,4126 27511,4248 27710,4447 27710,4649 27668.53,4690.47 U1.42
UART2_R_1: GPS1.2 U1.17 | length 1725.5
  Top Layer w10: v1(27824,5739) 27826.18,5736.82 GPS1.2
  MidLayer2 w10: v1(26908,5076) 26908,5327 27044,5463 27318,5463 27594,5739 v1(27824,5739)
  Bottom Layer w10: v1(26908,5076) 26908,5054 27021.53,4940.47 U1.17
UART2_T_1: GPS1.3 U1.16 | length 1641.1
  Top Layer w10: GPS1.3 27875.39,5692.39 v1(27876,5693)
  MidLayer2 w10: v1(26971,4907) 26971,5333 27067,5429 27336,5429 27599,5692 27875,5692 v1(27876,5693)
  Bottom Layer w10: v1(26971,4907) 26972,4908 26999.53,4880.47 U1.16
UART3_R_1: PI1.3 U1.30 | length 2027.2
  Top Layer w10: v1(27327,4614) 27327,4461 27432,4356 v1(27432,4298) ; PI1.3 27869,3824 27904,3859 28109,3859 28139,3889 v1(28139,3908)
  MidLayer1 w10: v1(27432,4298) 27818,4298 28139,3977 v1(28139,3908)
  Bottom Layer w10: v1(27327,4614) 27326,4613 27326,4609 27328.27,4611.27 U1.30
UART3_T_1: PI1.4 U1.29 | length 1934.7
  Top Layer w10: v1(27166,4113) 27253,4200 27253,4610 v1(27212,4651) ; PI1.4 27769,3885 v1(27838,3954)
  MidLayer1 w10: v1(27166,4113) 27199,4080 27706,4080 27838,3948 v1(27838,3954)
  Bottom Layer w10: v1(27212,4651) 27209,4651 27209,4730 27308.58,4829.58 U1.29
UART4_R_1: FLOW.4 U1.52 | length 1035.1
  Top Layer w10: FLOW.4 26786,3931 26796,3941 26897,3941 26987,4031 27199,4031 27321,4153 v1(27321,4376)
  Bottom Layer w10: U1.52 27308.58,4388.42 v1(27321,4376)
UART4_T_1: FLOW.3 U1.51 | length 873.6
  MidLayer2 w10: v1(26835,3905) 26835,3908 26834,3909 26911,3909 v1(27363,4361)
  Bottom Layer w10: U1.51 27328.27,4421.73 27363,4387 v1(27363,4361)
VCC_DJ: DC.2 DC.3 P1.2 P2.2 P3.2 P5.2 P6.2 P7.2 P8.2 P9.2 P10.2 P11.2 P12.2 P13.2 | length 11301.9
  MidLayer1 w40: P3.2 P2.2 P1.2 P8.2 P9.2 P10.2 26138,3894 26180,3852 26365,3852 27249,3852 27412,4015 27686,4015 27849,3852 28229,3852 28314,3937 P13.2 28316,3984 28316,4439 28295,4460 DC.2 DC.3 28307,4560 28314,4567 28314,5346 28314,5445 P7.2
  MidLayer2 w40: P3.2 P2.2 P1.2 P8.2 P9.2 P10.2 26138,3895 26179,3854 27256,3854 27418,4016 27688,4016 27848,3856 28233,3856 28316,3939 28316,4182 28316,4438 28294,4460 DC.2 DC.3 28304,4560 28315,4571 P5.2 P6.2 P7.2
  Bottom Layer w40: P13.2 P12.2 P11.2
VG: IIC1.4 IIC2.4 IIC3.4 IIC4.4 SEL.3 SEL.4 | length 4802.7
  Top Layer w20: v1(26448,4158) 26452,4154 IIC3.4 ; v1(26463,5414) IIC1.4 ; IIC2.4 v1@27965,5262
  Top Layer w30: IIC4.4 27975,4009 v1(27976,4008) ; v1@27965,5262 v1(27966,5261)
  MidLayer1 w30: v1(26448,4158) 26448,4227 ; v1(26463,5414) 26462,5414 26448,5400 26448,5260 ; v1(27966,5261) 26449,5261 26448,5260 ; v1(27976,4008) 27757,4227 26448,4227 ; 26448,4227 SEL.4 26448,4711 ; 26448,4711 SEL.3 ; 26448,4711 SEL.3 ; SEL.3 26448,5260
pads on no net: *U1.9 FLOW.GND GPS1.GND IIC1.GND IIC2.GND IIC3.GND IIC4.GND KEY.3 MEMS.0 NRF1.0 RADIO.GND SW1. SWD1.GND
copper on no net:
  other v3: 26083,3759 28365,3759 28368,3759 26083,5689 28368,5689

## Polygon pours and split planes (outlines as drawn)
GND on Bottom Layer "Top Layer-No Net" (hatched 90Degree grid 20 track 8, remove dead copper, pour order 1000): 25659.87,5851.14 25659.87,3419.14 25612.87,3372.14 25693.87,3453.14 28460.87,3453.14 28460.87,5878.14 28467.87,5885.14
GND on Top Layer "Top Layer-No Net" (hatched 90Degree grid 20 track 8, remove dead copper, pour order 1001): 25695.73,6050.89 25715.73,6030.89 25715.73,3599.89 28731.73,3599.89 28772.73,3558.89 28731.73,3599.89 28731.73,6104.89

## Keep-outs
Keep-Out Layer:
  circle w10: c26083,5688 r123.71
  circle w10: c28367,5687 r123.71
  lines w10: 25941,3751 ccw(c26073,3751) 26073,3619 ; 25942,3755 25942,5693 cw(c26074,5693) 26074,5825 28351,5825 ; 26079,3618 28343,3618 ccw(c28343,3783) 28508,3783 28508,5668 ; 28346,5825 cw(c28346,5660) 28511,5660

## Silkscreen, mask and mechanical layers (free items; w line width, h text height)
Top Overlay:
  circle w10: c26083,5689 r138
  circle w10: c28368,5689 r138
  circle w10: c28368,3759 r139
  circle w10: c26083,3759 r138
  rectangle: 26827,4428 27561,4998
  region: 27192,5550 27192,5595 26811,5595 26811,5550
  rectangle: 26416,4713 26729,4780
  rectangle: 26417,4609 26730,4677
  lines w10: 25942,5694 25942,3759 25944,3757 ; 26081,5825 28365,5825 ; 26083,3618 28367,3618 ; 27154,4247 26986,4247 ; 28507,3759 28507,5688 ; 26986,4247 27022,4283 27022,4211 26986,4247 ; 26083,3759 28368,3759 28368,5689 26083,5689 26083,3759
  text "S+G" at 28166,5507 h60
  text "G+S" at 26176,5506 h60
  text "+RTCDG" at 27647,5467 h60
  text "-CD+" at 27451,5459 h60
  text "GCD+" at 26924,5382 h60
  text "+GCD" at 26622,5261 h60 r270
  text "+GCD" at 27884,5095 h60 r90
  text "G" at 28119,4836 h60
  text "3.3" at 26415,4820 h60
  text "G" at 28120,4739 h60
  text "5V" at 28108,4642 h60
  text "G" at 27594,4599 h60
  text "+" at 27599,4553 h60
  text "DJ" at 28104,4545 h60
  text "5" at 26419,4543 h60
  text "DJ" at 28101,4441 h60
  text "+GCD" at 26615,4343 h60 r270
  text "+" at 28114,4336 h60
  text "+GCD" at 27890,4195 h60 r90
  text "RTG+" at 26813,3941 h60
  text "TRG+" at 27168,3941 h60
  text "S+G" at 28172,3883 h60
  text "G+S" at 26179,3868 h60
  text "SBUS" at 26388,3834 h60
  text "TRG+" at 27845,3797 h60
  text "G+S" at 26415,3648 h60
Bottom Overlay:
  text "P6" at 28059,5382 h60
  text "P3" at 26318,5375 h60
  text "P5" at 28057,5283 h60
  text "P2" at 26317,5275 h60
  text "P4" at 28053,5182 h60
  text "P1" at 26317,5168 h60
  text "P10" at 28049,4214 h60
  text "P7" at 26336,4206 h60
  text "P11" at 28049,4112 h60
  text "P8" at 26334,4111 h60
  text "P12" at 28049,4008 h60
  text "P9" at 26332,4006 h60

## Text inside footprints (layer, text, board x,y; h text height)
SEL: Top Overlay "3" at 26388,4766 h50 r180; Top Overlay "4" at 26388,4666 h50 r180; Top Overlay "2" at 26648,4666 h50 r180; Top Overlay "1" at 26628,4766 h50 r180